# EAGLE board StereoOutputBoard (EAGLE 7.7.0)
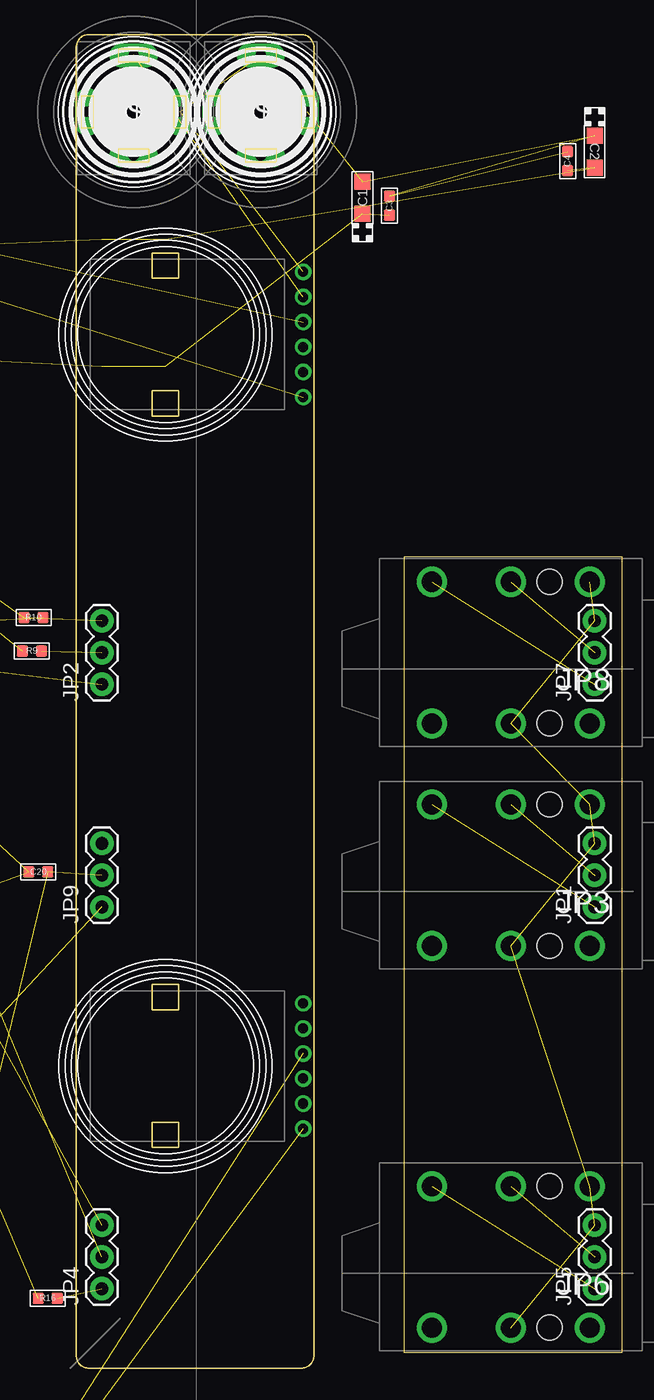
[diagram p0: board, top side]
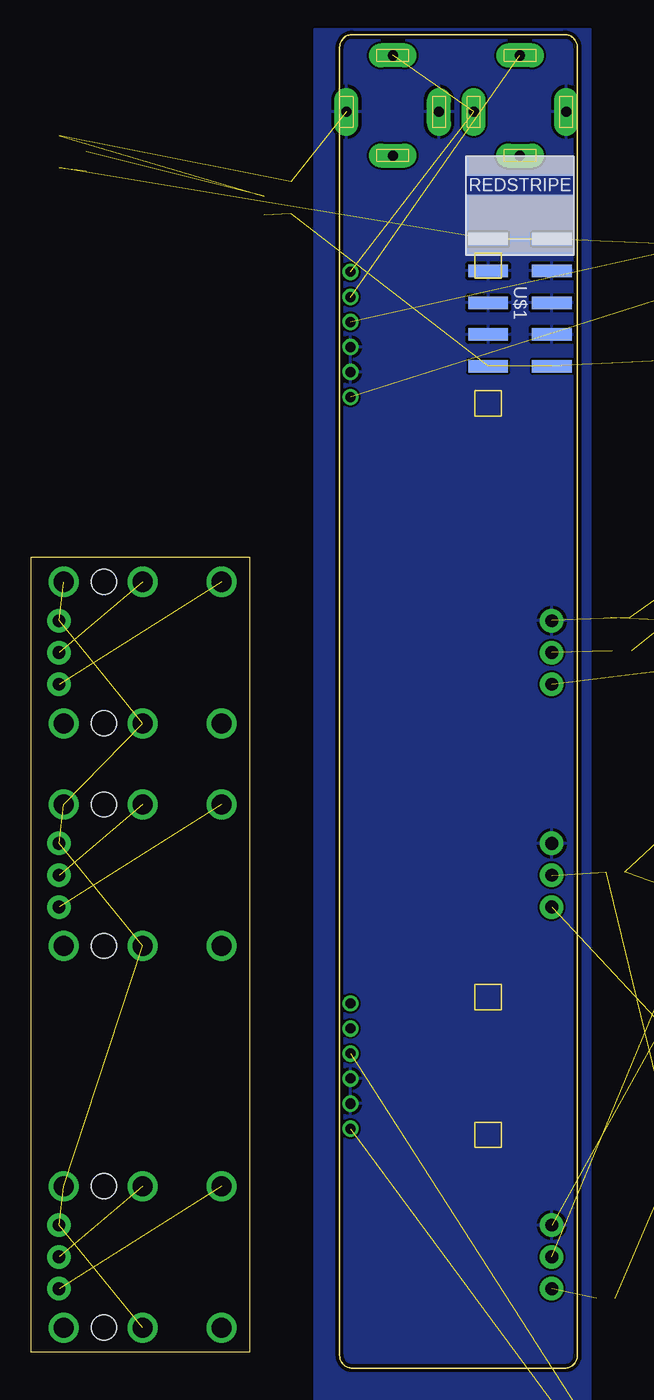
[diagram p1: board, bottom side, seen from below]

Size 43.62 x 106.5 mm. Coordinates in mm from the lower left corner, seen from the top.
Outline: 26.17,64.77 26.17,1.27 43.62,1.27 43.62,64.77 26.17,64.77
Copper layers (1*16): Top 0.035mm / dielectric 1.5mm / Bottom 0.035mm
Design rules "ITEADstudio_DRC": minimum track width 6mil, minimum drill 12mil, track to track 6mil, track to pad 6mil, pad to pad 6mil, via to via 6mil, smd to smd 0mil, copper to edge 10mil, drill to drill 10mil, minimum pad ring 10mil, minimum via ring 6mil, stop-mask expansion 2mil, vias tented up to drill 100mil, thermal gap 10mil

## Footprints (pad centres in the part's own frame; a part is rotated, then mirrored left to right if it is on the bottom)
AVX-A = smd 1.27 x 1.27: + -1.27,0; - 1.27,0
C0603 = smd 0.889 x 0.889: 1 -0.762,0; 2 0.762,0
153CLV-0505 = smd 3 x 1.6: + 2.2,0; - -2.2,0
SO08 = smd 0.6 x 2.2: 1 -1.905,-2.6; 2 -0.635,-2.6; 3 0.635,-2.6; 4 1.905,-2.6; 5 1.905,2.6; 6 0.635,2.6; 7 -0.635,2.6; 8 -1.905,2.6
1X03 = drill 1.016 pad 1.88: 1 0,0; 2 2.54,0; 3 5.08,0
AUDIO-JACK-.25-INCH-HORIZ-PTH = drill 1.6: P$2 4.2,-6.92; P$3 4.2,4.38; P$4 10.5,-6.92; P$5 10.5,4.38; P$6 16.8,-6.92; P$7 16.8,4.38 | hole 2: 7.4,4.38; 7.4,-6.92
R0603 = smd 0.889 x 0.889: 1 -0.762,0; 2 0.762,0
SOT223 = smd 1.27 x 2.286: 1 -2.286,-3.175; 2 0,-3.175; 3 2.286,-3.175 | smd 3.556 x 2.159: TER 0,3.175
2X05_SMT_HEADER = smd 1 x 3.17: 1 -5.08,-2.54; 2 -5.08,2.54; 3 -2.54,-2.54; 4 -2.54,2.54; 5 0,-2.54; 6 0,2.54; 7 2.54,-2.54; 8 2.54,2.54; 9 5.08,-2.54; 10 5.08,2.54
RK12 = drill 0.8: R1_1 -3,-11; R1_2 -5,-11; R1_3 5,-11; R2_1 -1,-11; R2_2 1,-11; R2_3 3,-11
3.5MM-JACK-SWITCH-13MM-INPUT = drill 0.8 pad 1.93 long: RING@3 -3.7,0; SECOND@3 0,-3.5; SWITCH@3 3.7,0; TIP@3 0,4.5
QSOP16 = smd 0.45 x 1.5: 1 -2.223,-2.69; 2 -1.587,-2.69; 3 -0.953,-2.69; 4 -0.318,-2.69; 5 0.318,-2.69; 6 0.953,-2.69; 7 1.587,-2.69; 8 2.223,-2.69; 9 2.223,2.69; 10 1.587,2.69; 11 0.953,2.69; 12 0.318,2.69; 13 -0.318,2.69; 14 -0.953,2.69; 15 -1.587,2.69; 16 -2.223,2.69

## Placement (x,y rotation side)
C1  10uF  [AVX-A]  22.87,93.47 90 top
C2  10uF  [AVX-A]  41.41,97.16 270 top
C3  100nF  [C0603]  25.03,92.84 270 top
C4  100nF  [C0603]  39.25,96.39 90 top
C5  100nF  [C0603]  -33.77,92.08 90 top  (outside the outline)
C6  100nF  [C0603]  -29.58,80.52 90 top  (outside the outline)
C7  22p  [C0603]  -31.87,81.28 180 top  (outside the outline)
C8  220uF  [153CLV-0505]  -30.73,70.87 90 top  (outside the outline)
C9  220uF  [153CLV-0505]  -30.73,62.99 270 top  (outside the outline)
C10  22p  [C0603]  -25.14,81.28 180 top  (outside the outline)
C11  220uF  [153CLV-0505]  -25.65,70.87 90 top  (outside the outline)
C12  220uF  [153CLV-0505]  -25.65,62.99 270 top  (outside the outline)
C13  10uF  [AVX-A]  -34.79,-31.75 180 top  (outside the outline)
C14  100nF  [C0603]  -34.79,-30.48 0 top  (outside the outline)
C15  1uF  [C0603]  -20.82,-25.4 0 top  (outside the outline)
C16  1uF  [C0603]  -19.55,-35.56 0 top  (outside the outline)
C17  100nF  [C0603]  -22.85,80.52 90 top  (outside the outline)
C18  100nF  [C0603]  -27.04,92.08 90 top  (outside the outline)
C19  10nF  [C0603]  -15.74,35.56 180 top  (outside the outline)
C20  1nF  [C0603]  -3.04,39.62 0 top
C21  1nF  [C0603]  -14.72,19.68 180 top  (outside the outline)
C22  1uF  [C0603]  -14.47,-30.48 270 top  (outside the outline)
IC1  NE5532D  [SO08]  -31.87,86.36 180 top  (outside the outline)
IC2  NE5532D  [SO08]  -25.14,86.36 180 top  (outside the outline)
JP1  [1X03]  41.41,36.83 90 top
JP2  [1X03]  2.04,54.61 90 top
JP3  [AUDIO-JACK-.25-INCH-HORIZ-PTH]  45.22,38.1 180 top
JP4  [1X03]  2.04,6.35 90 top
JP5  [1X03]  41.41,6.35 90 top
JP6  [AUDIO-JACK-.25-INCH-HORIZ-PTH]  45.22,7.62 180 top
JP7  [1X03]  41.41,54.61 90 top
JP8  [AUDIO-JACK-.25-INCH-HORIZ-PTH]  45.22,55.88 180 top
JP9  [1X03]  2.04,36.83 90 top
R1  100k  [R0603]  -23.87,92.71 180 top  (outside the outline)
R2  100k  [R0603]  -30.6,92.71 180 top  (outside the outline)
R3  220k  [R0603]  -23.87,91.44 180 top  (outside the outline)
R4  4.7k  [R0603]  -26.66,78.36 180 top  (outside the outline)
R5  220k  [R0603]  -30.6,91.44 180 top  (outside the outline)
R6  4.7k  [R0603]  -33.39,78.36 180 top  (outside the outline)
R7  4.7k  [R0603]  -31.87,80.01 180 top  (outside the outline)
R8  27  [R0603]  -34.16,80.52 270 top  (outside the outline)
R9  27  [R0603]  -3.55,57.28 0 top
R10  22k  [R0603]  -3.42,59.94 0 top
R11  56  [R0603]  -29.96,58.42 180 top  (outside the outline)
R12  4.7k  [R0603]  -25.14,80.01 180 top  (outside the outline)
R13  27  [R0603]  -17.14,68.58 0 top  (outside the outline)
R14  27  [R0603]  -27.42,80.52 270 top  (outside the outline)
R15  22k  [R0603]  -24.88,58.42 180 top  (outside the outline)
R16  56  [R0603]  -2.28,5.59 180 top
U1  CJ1117-5.0-1310170P1  [SOT223]  -33.52,-24.13 0 top  (outside the outline)
U$1  POWER_SIMPLE  [2X05_SMT_HEADER]  4.58,85.09 270 bottom
U$2  STEREOPOTRK12  [RK12]  7.12,82.55 90 top
U$3  PJ-341  [3.5MM-JACK-SWITCH-13MM-INPUT]  4.58,100.33 0 top
U$4  MAX13330  [QSOP16]  -18.28,-30.48 0 top  (outside the outline)
U$5  PJ-341  [3.5MM-JACK-SWITCH-13MM-INPUT]  14.74,100.33 0 top
U$6  EURORACK_PCB4HP  [EURORACK4HPPCB]  -0.5,0 0 top
U$7  STEREOPOTRK12  [RK12]  7.12,24.13 90 top

## Library data of the parts
C1 C2 C13 IC1 IC2 U$1 U$2 U$6 U$7 = EurorackModularParts
C3-C7 C10 C14-C22 R1-R16 U1 = OPL
C8 C9 C11 C12 = adafruit
JP1 JP2 JP4 JP5 JP7 JP9 = SparkFun-Connectors
JP3 JP6 JP8 = EurorackModularParts; PROD_ID: COM-11144
U$3 U$5 = EurorackModularParts; DESC: Input; MPN: PJ-341
U$4 = ld-components

## Nets
5V: C13.+ C14.2 C16.1 U1.2 U1.TER U$4.5 U$4.6 U$4.7
+12V: C1.+ C3.2 C6.2 C17.2 IC1.8 IC2.8 U1.3 U$1.9 U$1.10
-12V: C2.- C4.1 C5.1 C18.1 IC1.4 IC2.4 U$1.1 U$1.2
GND: C1.- C2.+ C3.1 C4.2 C5.2 C6.1 C13.- C14.1 C15.1 C16.2 C17.1 C18.2 C19.1 C20.1 C21.2 IC1.3 IC2.3 JP2.3 JP4.3 JP9.3 R8.2 R10.1 R13.2 R15.1 U1.1 U$1.3 U$1.4 U$1.5 U$1.6 U$1.7 U$1.8 U$2.R1_1 U$2.R2_1 U$3.RING@3 U$4.2 U$4.4 U$4.9 U$4.15 U$5.RING@3 U$5.SWITCH@3 U$7.R1_1 U$7.R2_1
GND2: JP1.3 JP3.P$2 JP3.P$5 JP5.3 JP6.P$2 JP6.P$5 JP7.3 JP8.P$2 JP8.P$5
N$1: JP2.1 R11.1
N$2: JP1.1 JP3.P$6
N$3: C9.+ R10.2 R11.2
N$4: C7.1 C8.+ IC1.7 R7.1
N$5: IC1.5 R8.1 R9.1
N$6: JP2.2 R9.2
N$7: C7.2 IC1.6 R6.1 R7.2
N$8: IC1.2 R2.2 R5.2
N$9: JP4.1 R16.1
N$10: C12.+ R15.2 R16.2
N$11: C10.1 C11.+ IC2.7 R12.1
N$12: IC1.1 R5.1 R6.2
N$13: C8.- C9.-
N$14: R2.1 U$2.R1_2
N$15: IC2.5 R13.1 R14.1
N$16: JP4.2 R14.2
N$17: C10.2 IC2.6 R4.1 R12.2
N$18: JP1.2 JP3.P$4
N$19: IC2.2 R1.2 R3.2
N$20: R1.1 U$2.R2_2
N$21: IC2.1 R3.1 R4.2
N$22: C11.- C12.-
N$23: U$2.R1_3 U$3.SWITCH@3 U$5.TIP@3
N$24: U$2.R2_3 U$3.TIP@3
N$25: JP5.1 JP6.P$6
N$26: JP5.2 JP6.P$4
N$27: JP7.1 JP8.P$6
N$28: JP7.2 JP8.P$4
N$29: C15.2 U$4.11 U$4.14
N$30: C19.2 U$4.12
N$31: C21.1 JP9.1 U$4.16
N$32: C20.2 JP9.2 U$4.13
N$33: C22.2 U$4.8
N$34: C22.1 U$4.10
N$35: U$4.1 U$7.R1_2
N$36: U$4.3 U$7.R2_2

## Tracks (layer width: path | path; a pad name or v marks a point on that pad's centre or on a via)
5V  (7 unrouted)
+12V  (8 unrouted)
-12V  (7 unrouted)
GND  (26 unrouted)
  pour Bottom: -1.01,106.93 -1.01,-2.92 20.96,-2.92 20.96,106.93
GND2  (8 unrouted)
N$1  (1 unrouted)
N$2  (1 unrouted)
N$3  (2 unrouted)
N$4  (3 unrouted)
N$5  (2 unrouted)
N$6  (1 unrouted)
N$7  (3 unrouted)
N$8  (2 unrouted)
N$9  (1 unrouted)
N$10  (2 unrouted)
N$11  (3 unrouted)
N$12  (2 unrouted)
N$13  (1 unrouted)
N$14  (1 unrouted)
N$15  (2 unrouted)
N$16  (1 unrouted)
N$17  (3 unrouted)
N$18  (1 unrouted)
N$19  (2 unrouted)
N$20  (1 unrouted)
N$21  (2 unrouted)
N$22  (1 unrouted)
N$23  (2 unrouted)
N$24  (1 unrouted)
N$25  (1 unrouted)
N$26  (1 unrouted)
N$27  (1 unrouted)
N$28  (1 unrouted)
N$29  (2 unrouted)
N$30  (1 unrouted)
N$31  (2 unrouted)
N$32  (2 unrouted)
N$33  (1 unrouted)
N$34  (1 unrouted)
N$35  (1 unrouted)
N$36  (1 unrouted)